# Altium PCB DMI.PcbDoc
Units mm, origin at the board's own origin, x right, y up, seen from the top; angles counter-clockwise.
Board outline 60 x 60 mm, 2 copper layers (Top Layer, Bottom Layer); 48 components, 45 nets, 196 pads, 110 vias.
Unrouted connection lines stored in the file: 58.
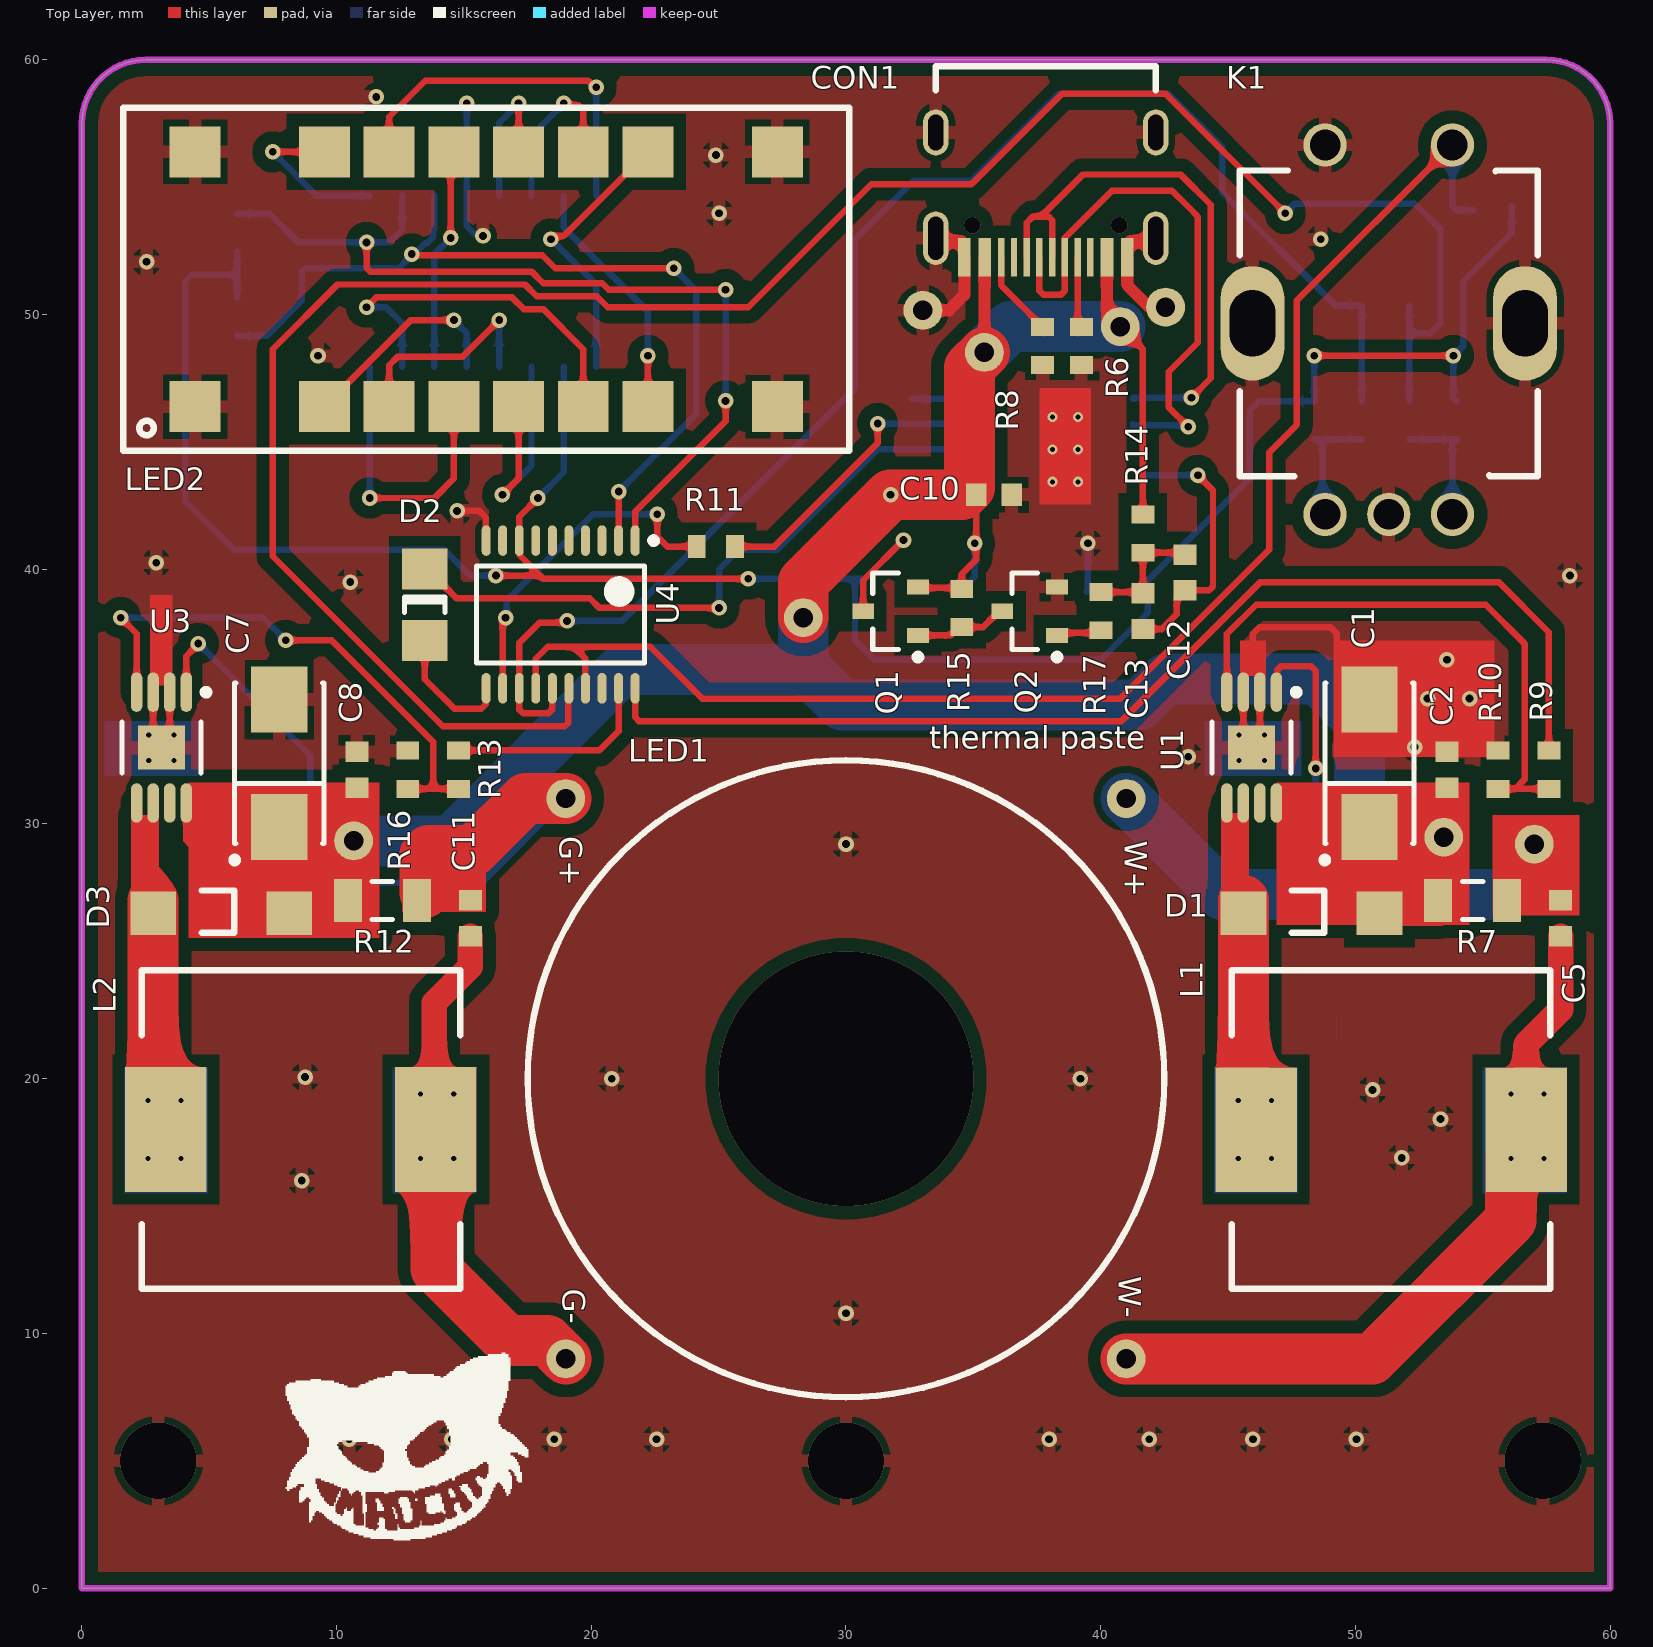
[diagram p0: Top Layer view]
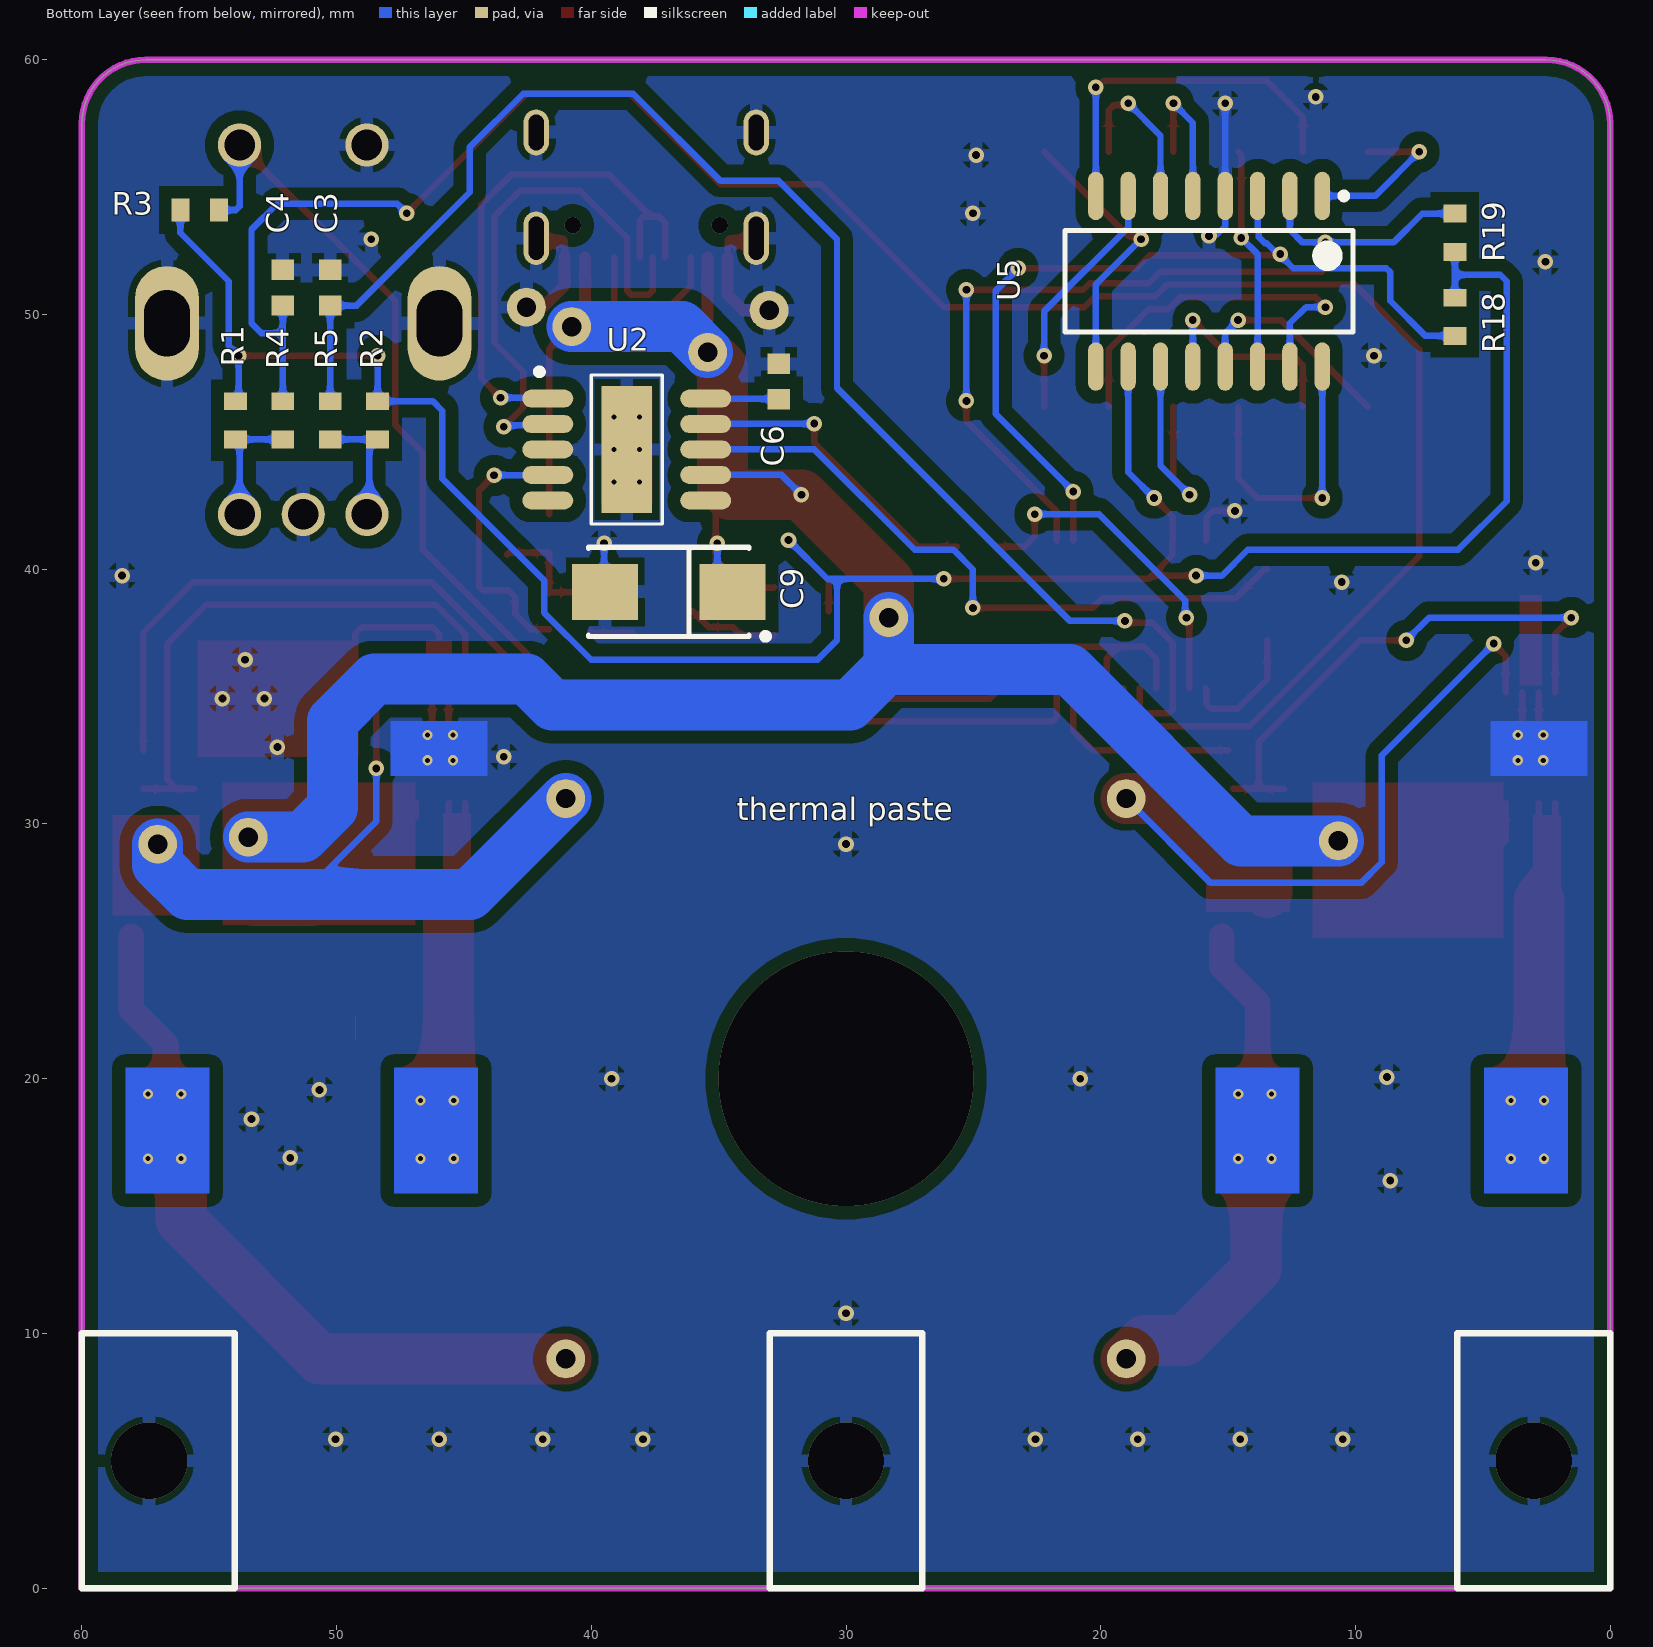
[diagram p1: Bottom Layer view, seen from below]

## Layer stack, top to bottom
Top Solder: solder mask 0.0102, Solder Resist, Dk 3.5
Top Layer: signal copper 0.0356
Dielectric 1: dielectric 0.32, FR-4, Dk 4.8
Bottom Layer: signal copper 0.0356
Bottom Solder: solder mask 0.0102, Solder Resist, Dk 3.5

## Board outline
0,0 60,0 60,0.009 60,57.5 ccw(c57.5,57.5) 57.5,60 2.5,60 ccw(c2.5,57.5) 0,57.5

## Design rules (kind name [scope] priority, off if disabled: settings)
Clearance Clearance_2 [HasFootprint('TSOP65P490_HS-8N')] p1: gap=0.2 ignorepadtopadclearanceinfootprint=TRUE
Clearance Clearance_1 [WithinRoom('USB') vs WithinRoom('USB')] p2: gap=0.15 ignorepadtopadclearanceinfootprint=FALSE
Clearance [All] p3: gap=0.254 ignorepadtopadclearanceinfootprint=TRUE except(0.508: Arc-Poly Arc-Region Track-Poly Track-Region SMDPad-Poly SMDPad-Region THPad-Poly THPad-Region Via-Poly Via-Region Fill-Poly)
HoleSize [All] p1: absolutevalues=TRUE maxlimit=10 minlimit=0.025 maxpercent=80.000 minpercent=20.000
MinimumSolderMaskSliver MinimumSolderMaskSliver_3 [HasFootprint('TSOP65P640-20BL')] p1: minsoldermaskwidth=0.09
MinimumSolderMaskSliver MinimumSolderMaskSliver_2 [HasFootprint('ESOP100-10')] p2: minsoldermaskwidth=0.09
MinimumSolderMaskSliver MinimumSolderMaskSliver_1 [WithinRoom('USB')] p3: minsoldermaskwidth=0.04
MinimumSolderMaskSliver [All] p4: minsoldermaskwidth=0.254
PolygonConnect [All] p1: connectstyle=Relief reliefconductorwidth=0.508 reliefentries=4 polygonreliefangle="90 Angle" airgapwidth=0.254
RoomDefinition USB [False] p1: confinementstyle=ConfineIn formatcopy=TRUE lockcomponents=FALSE outline 32.385,49.276 32.385,60.071 43.434,60.071 43.434,49.276
RoutingVias [All] p1: holewidth=0.305 width=0.61 viastyle="Through Hole" minholewidth=0.305 minwidth=0.61 maxholewidth=0.6 maxwidth=0.85
SMDEntry [All] p1: side=TRUE corner=TRUE anyangle=TRUE
SilkToSolderMaskClearance SilkToSolderMaskClearance_1 [HasFootprint('CD3216-1206')] p1: minsilkscreentomaskgap=0.09 clearancetoexposedcopper=TRUE
SilkToSolderMaskClearance [IsPad] p2: minsilkscreentomaskgap=0.254 clearancetoexposedcopper=TRUE
SolderMaskExpansion [All] p1: expansion=0.102 istentingtop=FALSE
SupplyNets "Schematic Supply Nets_2" [InNet('VMCU')] p1: voltage=0.000
SupplyNets "Schematic Supply Nets_1" [InNet('+5')] p2: voltage=0.000
SupplyNets "Schematic Supply Nets" [InNet('GND')] p3: voltage=0.000
Width Width_1 [InNetClass('Power')] p1: maxlimit=2 minlimit=0.254 preferedwidth=0.254
Width [All] p2: maxlimit=0.254 minlimit=0.254 preferedwidth=0.254
27 further rules are at their usual default settings.

## Classes and differential pairs
net class Power: +5 G+ G- GND NetD1_1 NetD3_1 VMCU W+ W-

## Components (designator, comment, footprint, x,y, rotation, side; value= is the part's Value field where it differs from the comment)
C1 "16V" TC6032-2412 50.55,32.385 r90 top locked value=100uF
C2 "50V" CAPC1608L 53.595,32.13 r270 top locked value=104
C3 "50V" CAPC1608L 50.25,51.054 r270 bottom value=104
C4 "50V" CAPC1608L 52.112,51.054 r270 bottom value=104
C5 "50V" CAPC1608L 58.056,26.3 r90 top locked value=104
C6 "50V" CAPC1608L 32.639,47.371 r270 bottom value=104
C7 "16V" TC6032-2412 7.75,32.385 r90 top value=100uF
C8 "50V" CAPC1608L 10.795,32.13 r270 top locked value=104
C9 "16V" TC6032-2412 36.957,39.116 r0 bottom value=100uF
C10 "50V" CAPC1608L 35.814,42.926 r180 top value=104
C11 "50V" CAPC1608L 15.256,26.3 r90 top locked value=104
C12 "" CAPC1608L 43.307,39.878 r270 top value=106
C13 "" CAPC1608L 41.656,38.354 r270 top value=106
CON1 "USB-TYPEE_C" USB-TYPE_C 37.844,52.45 r180 top
D1 "SS34" DO-214AC 48.27,26.5 r0 top locked
D2 "1N4148" CD3216-1206 13.462,38.608 r90 top
D3 "SS34" DO-214AC 5.47,26.5 r0 top
K1 "EC11" EC11 51.308,49.657 r0 top
L1 "3A" CYH125 51.4,18 r0 top locked value=68uH
L2 "3A" CYH125 8.6,18 r0 top locked value=68uH
LED1 "DULE-LED" DULE-LED-3W 30,20 r270 top
LED2 "S2040AR" S2040AR 15.875,51.388 r0 top locked
Q1 "AO3401,A19T" SOT-23B_L 31.75,38.354 r180 top
Q2 "S8050,J3Y" SOT-23B_L 37.211,38.354 r180 top
R1 "Res1" RESC1608L 53.975,45.847 r270 bottom value=10K
R2 "Res1" RESC1608L 48.387,45.847 r270 bottom value=10K
R3 "Res1" RESC1608L 55.372,54.102 r180 bottom value=10K
R4 "Res1" RESC1608L 52.112,45.847 r90 bottom value=10K
R5 "Res1" RESC1608L 50.25,45.847 r90 bottom value=10K
R6 "Res1" RESC1608L 39.243,48.768 r270 top value=5.1K
R7 "1206 250mW" RESC3216L 54.6,27 r180 top locked value=0.15R
R8 "Res1" RESC1608L 37.719,48.768 r270 top value=5.1K
R9 "Res1" RESC1608L 57.595,32.13 r270 top value=10K
R10 "Res1" RESC1608L 55.595,32.13 r90 top locked value=10K
R11 "Res1" RESC1608L 24.892,40.894 r180 top value=300R
R12 "1206 250mW" RESC3216L 11.8,27 r180 top locked value=0.15R
R13 "Res1" RESC1608L 14.795,32.13 r270 top locked value=10K
R14 "Res1" RESC1608L 41.656,41.402 r270 top value=20K
R15 "Res1" RESC1608L 34.544,38.481 r90 top value=10K
R16 "Res1" RESC1608L 12.795,32.13 r90 top locked value=10K
R17 "Res1" RESC1608L 40.005,38.354 r90 top value=4.7K
R18 "Res1" RESC1608L 6.096,49.911 r90 bottom value=10K
R19 "Res1" RESC1608L 6.096,53.213 r270 bottom value=10K
U1 "AL8860" TSOP65P490_HS-8N 45.925,33 r270 top locked
U2 "CH340K" ESOP100-10 38.608,44.704 r180 bottom
U3 "AL8860" TSOP65P490_HS-8N 3.125,33 r270 top locked
U4 "STC8G1K08-38I" TSOP65P640-20BL 18.796,38.227 r270 top
U5 "TM1650" SOP127P762-16L 15.748,51.308 r270 bottom locked

## Footprints (in the part's own frame and the unit in brackets; to place one, negate y for a bottom-side part, rotate by r counter-clockwise, add the part's x,y. Pads: shape width x height; smd on the part's side, far side on the other; paste and mask are expansions set on the pad)
CAPC1608L [mm] "Chip Capacitor, Body 1.6x0.8mm, IPC High Density"
  rect 0.8x0.9 smd: 1(-0.7,0) 2(0.7,0)
  body extent -0.87,-0.48 0.87,0.48, height 0.85
CD3216-1206 [mm] "Chip Diode; Body 3.2 x 1.6 mm (LxW typ)"
  rect 1.6x1.8 smd: 1(-1.4,0) 2(1.4,0)
  silkscreen extent -0.3,-0.8 0.3,0.8
CYH125 [mm] "CYH125 Inductor"
  rect 3.2x4.9 smd: 1(-5.3,0) 2(5.3,0)
  silkscreen extent -6.25,-6.25 6.25,6.25
DO-214AC [mm] "DO-214AC"
  rect 1.8x1.7 smd: 1(-2.67,0) 2(2.67,0)
  silkscreen extent -0.76,-0.76 0.51,0.89, body extent -2.41,-1.4 2.41,1.4, height 2.5
DULE-LED-3W [mil] "DULE-LED-3W"
  round 60 hole 30: 1(-433.07,433.07) 2(-433.07,-433.07) 3(433.07,-433.07) 4(433.07,433.07)
  silkscreen extent -492,-492 492,492
EC11 [mm] "EC11"
  oval 2.5x4.5 hole 1.8 slot 2.6 at 90 deg: 1(-5.35,0) 1(5.35,0)
  round 1.7 hole 1.2: 2(-2.5,7) 3(2.5,7) 4(-2.5,-7.5) 5(0,-7.5) 6(2.5,-7.5)
  silkscreen extent -5.85,-6 5.85,6, body extent -5.84,-5.97 5.84,5.97, height 5
ESOP100-10 [mm] "10-Pin Small Outline Package 1.00 mm Pitch and Pad"
  rect 2x5 smd: 0(0,0)
  oval 2x0.7 smd: 1(-3.1,2) 2(-3.1,1) 3(-3.1,0) 4(-3.1,-1) 5(-3.1,-2) 6(3.1,-2) 7(3.1,-1) 8(3.1,0) 9(3.1,1) 10(3.1,2)
  silkscreen extent -3.55,-2.92 1.4,3.17, body extent -2.85,-3.18 2.85,3.43, height 2.2
RESC1608L [mm] "Chip Resistor, Body 1.6x0.8mm, IPC High Density"
  rect 0.7x0.9 smd: 1(-0.75,0) 2(0.75,0)
  body extent -0.85,-0.48 0.85,0.48, height 0.6
RESC3216L [mm] "Chip Resistor, Body 3.2x1.6mm, IPC High Density"
  rect 1.1x1.7 smd: 1(-1.35,0) 2(1.35,0)
  silkscreen extent -0.4,-0.75 0.4,0.75, body extent -1.68,-0.87 1.68,0.87, height 0.71
S2040AR [mm] "S2040AR"
  rect 2x2 smd: 1(-6.35,-5) 2(-3.81,-5) 3(-1.27,-5) 4(1.27,-5) 5(3.81,-5) 6(6.35,-5) 7(6.35,5) 8(3.81,5) 9(1.27,5) 10(-1.27,5) 11(-3.81,5) 12(-6.35,5) 13(-11.43,-5) 13(-11.43,5) 13(11.43,-5) 13(11.43,5)
  silkscreen extent -14.25,-6.73 14.25,6.73, body extent -14.35,-5.21 14.22,5.21, height 3
SOP127P762-16L [mm] "16-Pin Small Outline Package 1.27 mm Pitch"
  oval 1.9x0.6 smd: 1(-3.35,4.445) 2(-3.35,3.175) 3(-3.35,1.905) 4(-3.35,0.635) 5(-3.35,-0.635) 6(-3.35,-1.905) 7(-3.35,-3.175) 8(-3.35,-4.445) 9(3.35,-4.445) 10(3.35,-3.175) 11(3.35,-1.905) 12(3.35,-0.635) 13(3.35,0.635) 14(3.35,1.905) 15(3.35,3.175) 16(3.35,4.445)
  silkscreen extent -3.47,-5.65 2,5.65, body extent -2.85,-5.65 2.85,5.65, height 2.2
SOT-23B_L [mm] "SOT23, 3-Leads, Body 2.9x1.3mm, Pitch 0.95mm, Lead Span 2.4mm, IPC High Density"
  rect 0.85x0.6 smd: 1(-1.075,0.95) 2(-1.075,-0.95) 3(1.075,0)
  silkscreen extent -1.2,-1.5 0.7,1.92, body extent -0.7,-1.5 0.7,1.5, height 1.14
TC6032-2412 [mm] "Capacitor, SM Tantalum; Body 6.0 x 3.2 mm (LxW typ)"
  rect 2.6x2.2 smd: 1(-2.5,0) 2(2.5,0)
  silkscreen extent -3.92,-1.75 3.15,1.87, body extent -3.05,-1.65 3.17,1.65, height 3
TSOP65P490_HS-8N [mm] "TSOP, 8-Leads, Body 3x3mm, Pitch 0.65mm, Exposed Pad, IPC Medium Density"
  oval 1.55x0.45 smd: 1(-2.175,0.975) 2(-2.175,0.325) 3(-2.175,-0.325) 4(-2.175,-0.975) 5(2.175,-0.975) 6(2.175,-0.325) 7(2.175,0.325) 8(2.175,0.975)
  rect 1.73x1.85 smd: 9(0,0)
  silkscreen extent -2.3,-1.55 1,1.88, body extent -1.55,-1.55 1.55,1.55, height 1.09
TSOP65P640-20BL [mm] "TSOP, 20-Leads, Body 6.5x4.4mm, Pitch 0.65mm, IPC High Density"
  oval 1.2x0.35 smd: 1(-2.9,2.925) 2(-2.9,2.275) 3(-2.9,1.625) 4(-2.9,0.975) 5(-2.9,0.325) 6(-2.9,-0.325) 7(-2.9,-0.975) 8(-2.9,-1.625) 9(-2.9,-2.275) 10(-2.9,-2.925) 11(2.9,-2.925) 12(2.9,-2.275) 13(2.9,-1.625) 14(2.9,-0.975) 15(2.9,-0.325) 16(2.9,0.325) 17(2.9,0.975) 18(2.9,1.625) 19(2.9,2.275) 20(2.9,2.925)
  silkscreen extent -3.02,-3.3 1.9,3.78, body extent -2.25,-3.3 2.25,3.3, height 1.2
USB-TYPE_C [mm]
  oval 1x2.1 hole 0.6 slot 1.7 at 90 deg: 1(-4.32,-0.55) 1(4.32,-0.55)
  oval 1x1.8 hole 0.6 slot 1.4 at 90 deg: 1(-4.32,-4.7) 1(4.32,-4.7)
  rect 0.5x1.5 smd: 2(-3.2,0.2) 3(-2.4,0.2) 12(2.4,0.2) 13(3.2,0.2)
  rect 0.25x1.5 smd: 4(-1.75,0.2) 5(-1.25,0.2) 6(-0.75,0.2) 7(-0.25,0.2) 8(0.25,0.2) 9(0.75,0.2) 10(1.25,0.2) 11(1.75,0.2)
  silkscreen extent -4.32,-7.3 4.32,-6.35, body extent -4.32,-7.37 4.32,0.13, height 3.26

## Part data
C1 C7 C9: library part "Cap Pol1", "Polarized Capacitor (Radial)", LatestRevisionDate=17-Jul-2002, LatestRevisionNote="Re-released for DXP Platform.", PackageDescription="Polarized Capacitor (Radial); 2 Leads", PackageReference=RB7.6-15, Published=8-Jun-2000, Publisher="Altium Limited"
C2 C3 C4 C5 C6 C8 C10 C11 C12 C13: library part Cap, "Capacitor", LatestRevisionDate=17-Jul-2002, LatestRevisionNote="Re-released for DXP Platform.", PackageDescription="Radial Cap, Thru-Hole; 2 Leads; 0.3 in Pin Spacing", PackageReference=RAD-0.3, Published=8-Jun-2000, Publisher="Altium Limited"
D1 D3: library part "D Schottky", "Schottky Diode", Code_JEDEC=DO-214-AA, LatestRevisionDate=17-Jul-2002, LatestRevisionNote="Re-released for DXP Platform.", PackageDescription="DO-214-AA/SMB; 2 C-Bend Leads; Body 5.3 x 3.6 mm, inc. leads (LxW)", PackageReference=SMB, Published=8-Jun-2000, Publisher="Altium Limited"
D2: library part Diode, "Default Diode", Code_JEDEC=DO-214-AB, LatestRevisionDate=17-Jul-2002, LatestRevisionNote="Re-released for DXP Platform.", PackageDescription="DO-214-AB/SMC; 2 C-Bend Leads; Body 7.9 x 5.9 mm, inc. leads (LxW)", PackageReference=SMC, PackageVersion=Sep-1996, Published=8-Jun-2000, Publisher="Altium Limited"
L1 L2: library part Inductor, "Inductor", Code_IEC=1005, Code_JEITA=0402, LatestRevisionDate=29-May-2009, LatestRevisionNote="IPC-7351 Footprint Added.", PackageDescription="Chip Inductor", PackageReference=0402-A, Published=8-Jun-2000, Publisher="Altium Limited"
Q1: library part PMOS-2, "P-Channel Power MOSFET", ComponentLink1Description="Manufacturer Link", ComponentLink1URL=http://www.irf.com/, DatasheetVersion=PD-9.390D, LatestRevisionDate=17-Jul-2002, LatestRevisionNote="Re-released for DXP Platform.", Note="Pin 4 not drawn and electrically connected to Pin 2.", PackageDescription="TO, Thru-Hole, Vertical, Heatsink Mounted; 3 In-Line Leads; Pitch 2.54 mm", PackageReference=TO-220AB, PackageVersion=Feb-1997, Published=8-Jun-2000, Publisher="Altium Limited"
Q2: library part NPN, "NPN Bipolar Transistor", Code_JEDEC=TO-226-AA, LatestRevisionDate=17-Jul-2002, LatestRevisionNote="Re-released for DXP Platform.", PackageDescription="TO, Flat Index; 3 In-Line, Axial Leads; Body Dia. 4.8mm; Leads 0.55 x 0.51 mm (max)", PackageReference=TO-226-AA, Published=8-Jun-2000, Publisher="Altium Limited"
R1 R2 R3 R4 R5 R6 R8 R9 R10 R11 R13 R14 R15 R16 R17 R18 R19: "Resistor", LatestRevisionDate=17-Jul-2002, LatestRevisionNote="Re-released for DXP Platform.", PackageDescription="Axial Device, Thru-Hole; 2 Leads; 0.3 in Pin Spacing", PackageReference=AXIAL-0.3, Published=8-Jun-2000, Publisher="Altium Limited"
R7 R12: library part Res1, "Resistor", LatestRevisionDate=17-Jul-2002, LatestRevisionNote="Re-released for DXP Platform.", PackageDescription="Axial Device, Thru-Hole; 2 Leads; 0.3 in Pin Spacing", PackageReference=AXIAL-0.3, Published=8-Jun-2000, Publisher="Altium Limited"

## Free pads (board coordinates)
  round 1.524 hole 0.762: 18(10.668,29.337) 18(28.321,38.1) 18(33.02,50.165) 18(35.433,48.514) 18(40.767,49.53) 18(42.545,50.292) 18(53.467,29.483) 18(57.023,29.21)

## Via types
v1: diameter 0.61, hole 0.305, Top Layer to Bottom Layer, 74 vias
v2: diameter 0.4, hole 0.2, Top Layer to Bottom Layer, 30 vias
v3: diameter 3, hole 3, Top Layer to Bottom Layer, 3 vias
v4: diameter 0.65, hole 0.65, Top Layer to Bottom Layer, 2 vias
v5: diameter 10, hole 10, Top Layer to Bottom Layer, 1 vias

## Nets (pads, with @x,y where several pads share a name; then routed paths per layer and width w, separated by ;. In a path a pad name is that pad's centre, name@x,y a point inside that pad or via, vN(x,y) a via of type N, cw(c..) or ccw(c..) an arc to the next point about the centre after c; other vN are vias at no path point)
+5: C1.1 C2.2 C7.1 C8.2 C9.1 C10.2 CON1.3 CON1.12 D1.2 D3.2 pad.18@10.668,29.337 pad.18@28.321,38.1 pad.18@35.433,48.514 pad.18@40.767,49.53 pad.18@53.467,29.483 Q1.2 R7.2 R12.2 R14.1 R15.2 U1.8 U2.7 U3.8 | length 116.8
  Top Layer w0.254: U3.8 4.1,29.359 4.249,29.21 6.35,29.21 ; Q1.2 32.861,39.268 34.508,39.268 34.544,39.304 34.544,39.813 35.114,40.383 C10.2 ; pad.18@40.767,49.53 41.121,49.176 41.656,48.641 R14.1 ; U1.8@46.9,30.275 U1.8 ; C1.1@50.419,28.956 C1.1@50.669,29.206 ; C1.1@50.796,29.079 C1.1@50.796,29.885 ; C1.1@50.8,29.885 50.8,30.099 52.131,31.43 C2.2 ; 52.336,26.619 52.717,27 R7.2@52.796,27.079
  Top Layer w0.45: pad.18@40.413,49.884 cw(c40.767,49.53) 41.267,49.53 cw(c40.767,49.53) 41.121,49.176 cw(c40.767,49.53) pad.18@40.413,49.884
  Top Layer w0.47: pad.18@35.433,48.514 35.438,48.519 35.438,52.244 CON1.12 ; CON1.3 40.244,50.053 40.413,49.884 pad.18@40.767,49.53
  Top Layer w2: D3.2@8.14,27 9.525,27 ; pad.18@28.321,38.1 28.321,39.497 v1(31.75,42.926) 34.559,42.926 34.841,43.208 34.841,47.922 pad.18@35.433,48.514 ; D1.2@50.94,27 52.717,27 R7.2
  Bottom Layer w0.254: v1(31.75,42.926) 32.528,43.704 U2.7 ; C9.1 35.052,39.711 v1(35.052,41.021)
  Bottom Layer w2: pad.18@10.668,29.337 14.486,29.337 21.217,36.068 28.448,36.068 ; pad.18@28.321,38.1 28.321,36.195 28.448,36.068 ; pad.18@35.433,48.514 36.449,49.53 pad.18@40.767,49.53 ; pad.18@53.467,29.483 51.337,29.483 50.165,30.655 50.165,34.036 48.514,35.687 42.545,35.687 41.529,34.671 29.845,34.671 28.448,36.068
A: LED2.11 U5.8 | length 14.5
  Top Layer w0.254: LED2.11 12.065,57.769 13.478,59.182 19.866,59.182 20.12,58.928 v1(20.193,58.928)
  Bottom Layer w0.254: U5.8 v1(20.193,58.928)
B: LED2.7 U5.9 | length 11
  Top Layer w0.254: v1(18.415,52.959) 18.511,52.959 18.642,53.089 18.926,53.089 LED2.7
  Bottom Layer w0.254: v1(18.415,52.959) 20.193,51.181 U5.9
C: LED2.4 U5.11 | length 9.2
  Top Layer w0.254: v1(16.51,42.926) 17.145,43.561 LED2.4
  Bottom Layer w0.254: v1(16.51,42.926) 17.653,44.069 U5.11
D: LED2.2 U5.12 | length 8.5
  Top Layer w0.254: LED2.2 12.065,48.006 12.395,48.336 14.935,48.336 v1(16.383,49.784)
  Bottom Layer w0.254: U5.12 v1(16.383,49.784)
D+: CON1.7 CON1.9 U2.1 | length 22.1
  Top Layer w0.254: CON1.9 37.094,53.604 37.338,53.848 37.655,53.848 ; CON1.7 38.096,52.252 38.096,53.699 37.947,53.848 37.655,53.848 ; v1(43.561,46.736) 44.323,47.498 44.323,54.312 43.136,55.499 39.306,55.499 37.655,53.848
  Bottom Layer w0.254: U2.1@41.252,46.688 41.323,46.688 41.275,46.736 v1(43.561,46.736)
D-: CON1.6 CON1.8 U2.2 | length 22.2
  Top Layer w0.254: CON1.8 37.594,50.935 37.743,50.786 38.445,50.786 38.594,50.935 CON1.6 38.596,52.252 38.596,53.019 40.441,54.864 42.799,54.864 43.434,54.229 43.815,53.848 43.815,48.895 42.672,47.752 42.672,46.355 v1(43.434,45.593)
  Bottom Layer w0.254: U2.2@41.252,45.688 41.292,45.648 43.379,45.648 v1(43.434,45.593)
DIG1: LED2.12 U5.1 | length 6.6
  Top Layer w0.254: v1(7.493,56.388) LED2.12
  Bottom Layer w0.254: v1(7.493,56.388) 9.223,54.658 U5.1
DIG2: LED2.9 U5.5 | length 5.9
  Top Layer w0.254: LED2.9 v1(17.145,58.293)
  Bottom Layer w0.254: U5.5 16.383,57.531 v1(17.145,58.293)
DIG3: LED2.8 U5.6 | length 6.7
  Top Layer w0.254: v1(18.923,58.293) 18.991,58.225 19.48,58.225 19.685,58.02 LED2.8
  Bottom Layer w0.254: U5.6 17.653,57.023 v1(18.923,58.293)
DIG4: LED2.6 U5.7 | length 9.6
  Top Layer w0.254: LED2.6 v1(22.225,48.387)
  Bottom Layer w0.254: U5.7 18.923,53.421 22.225,50.119 v1(22.225,48.387)
DIM1: R9.1 U4.20 | length 44.8
  Top Layer w0.254: U4.20 21.721,34.189 21.87,34.04 40.815,34.04 46.272,39.497 55.626,39.497 57.595,37.528 R9.1
DIM2: R13.1 U4.19 | length 8.1
  Top Layer w0.254: R13.1@14.986,32.893 20.32,32.893 21.071,33.644 U4.19
DP: LED2.3 U5.16 | length 11.6
  Top Layer w0.254: v1(11.303,42.799) 13.843,42.799 14.605,43.561 LED2.3
  Bottom Layer w0.254: v1(11.303,42.799) U5.16
DTR: C12.2 C13.2 U2.4 | length 10.6
  Top Layer w0.254: C13.2 42.396,37.654 42.984,38.242 42.984,38.905 43.257,39.178 C12.2 44.259,39.178 44.408,39.327 44.408,43.095 v1(43.815,43.688)
  Bottom Layer w0.254: U2.4 41.716,43.696 43.807,43.696 v1(43.815,43.688)
E: LED2.1 U5.13 | length 8.5
  Top Layer w0.254: LED2.1 12.921,49.784 v1(14.605,49.784)
  Bottom Layer w0.254: v1(14.605,49.784) 15.113,49.276 U5.13
F: LED2.10 U5.14 | length 8.7
  Top Layer w0.254: v1(14.478,53.01) 14.478,56.261 LED2.10
  Bottom Layer w0.254: U5.14 13.843,52.375 v1(14.478,53.01)
G: LED2.5 U5.15 | length 15.1
  Top Layer w0.254: v1(11.176,50.292) 11.557,50.673 16.891,50.673 17.348,50.216 18.11,50.216 19.685,48.641 LED2.5
  Bottom Layer w0.254: v1(11.176,50.292) 11.938,50.292 12.573,49.657 U5.15
G+: C11.2 LED1.2 R12.1 U3.1 | length 32.6
  Top Layer w0.254: U3.1 4.1,36.586 4.572,37.058 v1(4.572,37.084) ; R12.1 R12.1@13.462,27.312
  Top Layer w2: R12.1@13.462,27.312 13.462,28.807 13.611,28.956 15.367,28.956 17.411,31 LED1.2
  Bottom Layer w0.254: v1(4.572,37.084) 8.964,32.692 8.964,28.501 9.779,27.686 15.686,27.686 LED1.2
G-: C11.1 L2.2 LED1.3 | length 20.2
  Top Layer w0.254: L2.2@13.843,18.057 L2.2
  Top Layer w1: L2.2@13.843,18.057 13.843,22.987 15.256,24.4 C11.1
  Top Layer w2: L2.2 13.9,16.86 13.9,12.527 16.711,9.716 18.284,9.716 LED1.3
  other v2: 13.3,16.86 14.6,16.86 13.3,19.4 14.6,19.4
GND: C1.2 C2.1 C3.1 C4.1 C6.1 C7.2 C8.1 C9.2 C10.1 CON1.1 CON1.2 CON1.13 K1.1 K1.2 K1.5 LED2.13 pad.18@33.02,50.165 pad.18@42.545,50.292 Q2.2 R6.2 R8.2 R10.2 R16.2 U1.2 U1.3 U1.9 U2.0 U2.3 U3.2 U3.3 U3.9 U4.10 U5.4 | length 51.1
  Top Layer w0.254: U3.3 2.8,33.325 U3.9 3.45,33.325 U3.2 ; v1(14.732,42.291) 15.599,42.291 15.853,42.038 15.853,41.145 U4.10 ; CON1.1@33.524,53 CON1.1@33.651,52.873 ; CON1.13@34.521,52.873 34.644,52.75 CON1.13 ; CON1.2 41.044,52.75 CON1.2@41.167,52.873 ; CON1.1@42.037,52.873 CON1.1@42.164,53 ; v2(45.425,33.5) 45.6,33.675 U1.3 ; 45.974,36.512 45.974,37.465 46.228,37.719 49.022,37.719 49.276,37.465 49.276,37.084 49.943,36.417 49.943,36.406 50.349,36 53.145,36 ; U1.2 46.25,33.675 v2(46.425,33.5) ; v1(52.832,34.925) 52.832,35.687 53.145,36 ; v1(53.594,36.449) 53.145,36
  Top Layer w0.45: pad.18@33.52,50.165 ccw(c33.02,50.165) pad.18@33.52,50.165 ; pad.18@43.045,50.292 ccw(c42.545,50.292) pad.18@43.045,50.292
  Top Layer w0.47: pad.18@33.02,50.165 34.036,50.165 34.644,50.773 CON1.13 ; CON1.2 41.044,51.158 41.91,50.292 pad.18@42.545,50.292
  Top Layer w0.5: CON1.1@33.651,52.873 CON1.13@34.521,52.873 ; CON1.2@41.167,52.873 CON1.1@42.037,52.873
  Bottom Layer w0.254: v1(15.113,58.293) 15.113,53.467 15.426,53.154 15.68,53.154 v1(15.748,53.086) ; C9.2 39.497,39.156 v1(39.497,41.021)
  Bottom Layer w0.45: pad.18@33.52,50.165 ccw(c33.02,50.165) pad.18@33.52,50.165 ; pad.18@43.045,50.292 ccw(c42.545,50.292) pad.18@43.045,50.292
  other v1: 10.499,5.842 14.52,5.842 18.542,5.842 22.564,5.842 37.973,5.842 41.91,5.842 45.974,5.842 50.038,5.842 30,10.795 8.636,16.002 51.816,16.891 53.34,18.415 50.673,19.558 20.8,20 39.203,20 8.763,20.066 30,29.21 43.434,32.639 52.324,33.02 54.483,34.925 10.541,39.497 58.42,39.751 2.921,40.259 9.271,48.387 2.54,52.07 48.641,52.959 25.019,53.975 24.892,56.261 11.557,58.547
  other v2: 2.625,32.5 3.625,32.5 45.425,32.5 46.425,32.5 2.625,33.5 3.625,33.5 38.108,43.434 39.108,43.434 38.108,44.704 39.108,44.704 38.108,45.974 39.108,45.974
  other v3: 3,5 30,5 57.357,5
KA: C3.2 R5.2 U4.13 U4.15 | length 58.6
  Top Layer w0.254: U4.15 18.471,34.491 18.322,34.343 17.32,34.343 17.171,34.491 U4.13 17.171,37.11 17.966,37.905 18.982,37.905 v1(19.05,37.973)
  Bottom Layer w0.254: v1(19.05,37.973) 21.209,37.973 30.353,47.117 30.353,52.959 32.639,55.245 34.925,55.245 38.354,58.674 42.672,58.674 44.767,56.579 44.767,54.801 49.214,50.354 C3.2 R5.2
KB: C4.2 R4.2 U4.16 | length 86
  Top Layer w0.254: U4.16 19.103,35.309 19.103,33.983 18.954,33.835 14.171,33.835 7.493,40.513 7.493,48.641 10.033,51.181 17.399,51.181 17.856,50.724 20.217,50.724 20.649,50.292 26.162,50.292 30.988,55.118 32.385,55.118 34.925,55.118 38.481,58.674 42.545,58.674 v1(47.244,53.975)
  Bottom Layer w0.254: v1(47.244,53.975) 47.625,54.356 52.324,54.356 53.34,53.34 53.34,49.657 52.959,49.276 52.112,49.276 ; R4.2 52.112,49.276 ; C4.2 52.112,49.276
KC: K1.3 R3.2 U4.14 U4.17 | length 57.4
  Top Layer w0.254: U4.14 17.821,36.49 18.288,36.957 19.304,36.957 ; U4.17 19.771,36.49 19.304,36.957 ; K1.3 47.701,50.55 47.701,45.669 46.609,44.577 46.609,40.767 40.767,34.925 24.352,34.925 22.32,36.957 19.304,36.957
  Bottom Layer w0.254: K1.3 53.808,54.251 53.957,54.102 R3.2
NetC6_2: C6.2 U2.10 | length 2.5
  Bottom Layer w0.254: C6.2@32.589,46.671 C6.2 32.656,46.688 U2.10@35.052,46.688
NetC12_1: C12.1 C13.1 R14.2 R17.2 | length 5
  Top Layer w0.254: R17.2 41.606,39.104 C13.1 R14.2 43.233,40.652 C12.1
NetCON1_5: CON1.5 R6.1 | length 3
  Top Layer w0.254: R6.1@39.094,49.276 39.094,49.518 CON1.5
NetCON1_11: CON1.11 R8.1 | length 3.6
  Top Layer w0.254: CON1.11 36.094,51.143 R8.1 ; R8.1@37.745,49.276 R8.1@37.745,49.518
NetD1_1: D1.1 L1.1 U1.5 U1.6 | length 12.7
  Top Layer w0.254: U1.5 44.95,29.225 45.6,28.575 U1.6 ; v2(45.4,19.14) L1.1@45.6,19.34
  Top Layer w2: L1.1@45.6,19.34 D1.1@45.6,27
  other v2: 45.4,16.86 46.7,16.86 46.7,19.14
NetD2_2: D2.2 U2.8 | length 26.1
  Top Layer w0.254: D2.2 13.562,40.008 14.708,38.862 19.939,38.862 20.32,38.481 v1(25.019,38.481)
  Bottom Layer w0.254: v1(25.019,38.481) 25.019,40.005 25.781,40.767 27.305,40.767 31.242,44.704 U2.8
NetD3_1: D3.1 L2.1 U3.5 U3.6 | length 14.1
  Top Layer w0.254: U3.5 2.15,29.092 2.8,28.442 ; D3.1@2.8,27 2.8,28.442 ; U3.6 2.8,28.442
  Top Layer w2: L2.1@2.8,19.34 D3.1@2.8,27
  other v2: 2.6,16.86 3.9,16.86 2.6,19.14 3.9,19.14
NetK1_4: K1.4 R2.2 R5.1 | length 4.9
  Bottom Layer w0.254: R2.2 R2.2@48.487,45.097 ; K1.4 48.71,42.255 48.71,44.874 R2.2@48.487,45.097 ; R5.1 R2.2@48.487,45.097
NetK1_6: K1.6 R1.2 R4.1 | length 4.9
  Bottom Layer w0.254: R4.1 R1.2 53.808,44.93 K1.6
NetQ1_1: Q1.1 Q2.3 R15.1 | length 3.7
  Top Layer w0.254: Q1.1 34.117,37.404 34.444,37.731 R15.1 35.388,37.731 36.011,38.354 Q2.3
NetQ2_1: Q2.1 R17.1 | length 1.8
  Top Layer w0.254: Q2.1 38.386,37.504 39.905,37.504 R17.1
NetR9_2: R9.2 R10.1 U1.4 | length 23.6
  Top Layer w0.254: U1.4 44.957,35.182 44.957,37.464 46.101,38.608 55.118,38.608 56.642,37.084 56.642,31.75 56.277,31.385 55.6,31.385 R10.1 R9.2
NetR11_1: R11.1 U2.9 | length 12.3
  Top Layer w0.254: R11.1 27.178,40.894 31.242,44.958 v1(31.242,45.72)
  Bottom Layer w0.254: v1(31.242,45.72) 31.25,45.712 35.5,45.712 U2.9
NetR13_2: R13.2 R16.1 U3.4 | length 21.3
  Top Layer w0.254: v1(1.524,38.1) 2.15,37.474 U3.4 ; v1(8.001,37.211) 9.803,37.211 13.795,33.219 13.795,31.38 ; R16.1 13.795,31.38 ; R13.2 13.795,31.38
  Bottom Layer w0.254: v1(1.524,38.1) 7.112,38.1 v1(8.001,37.211)
RXD: D2.1 U4.11 | length 5.1
  Top Layer w0.254: D2.1 13.462,35.687 14.627,34.522 15.675,34.522 15.853,34.699 15.853,35.309 U4.11
SCL: R19.1 U4.1 U5.2 | length 35.3
  Top Layer w0.254: v1(11.176,52.832) 11.176,51.838 11.325,51.689 17.653,51.689 18.11,51.232 20.427,51.232 20.681,50.978 v1(25.273,50.978) ; U4.1 21.719,41.129 21.719,42.262 25.273,45.816 v1(25.273,46.609)
  Bottom Layer w0.254: R19.1 7.378,53.963 8.509,52.832 v1(11.176,52.832) 12.078,52.832 12.573,53.327 U5.2 ; v1(25.273,46.609) v1(25.273,50.978)
SDA: R18.1 U4.2 U5.3 | length 34.5
  Top Layer w0.254: v1(12.954,52.375) 13.005,52.324 18.08,52.324 18.588,51.816 v1(23.241,51.816) ; U4.2 21.076,41.133 21.076,43.047 v1(21.082,43.053)
  Bottom Layer w0.254: R18.1 7.251,49.161 8.636,50.546 8.636,51.667 8.785,51.816 12.446,51.816 v1@12.954,52.324 ; v1(12.954,52.375) v1@12.954,52.324 ; U5.3 13.843,53.345 13.792,53.294 13.792,53.042 13.552,52.802 13.478,52.802 12.999,52.324 v1@12.954,52.324 ; v1(21.082,43.053) 24.13,46.101 24.13,50.927 v1(23.241,51.816)
TXD: R11.2 U4.12 | length 13.4
  Top Layer w0.254: U4.12 16.521,37.888 16.637,38.004 v1(16.637,38.1) ; v1(22.591,42.164) 22.591,41.29 22.987,40.894 R11.2
  Bottom Layer w0.254: v1(16.637,38.1) 16.688,38.151 16.688,38.786 20.066,42.164 v1(22.591,42.164)
VMCU: Q1.3 R1.1 R2.1 R3.1 R18.2 R19.2 U4.8 U5.10 | length 98.6
  Top Layer w0.254: v1(16.256,39.751) 17.986,39.751 ; v1(17.907,42.799) 17.171,42.063 U4.8 17.189,41.109 17.189,40.547 17.986,39.751 ; v1(26.162,39.624) 18.113,39.624 17.986,39.751 ; Q1.3 30.675,39.565 v1(32.258,41.148) ; v1(48.387,48.387) v1(53.848,48.387)
  Bottom Layer w0.254: R18.2 6.096,51.562 ; R19.2 6.096,51.562 ; v1(16.256,39.751) 15.24,39.751 14.224,40.767 5.969,40.767 4.064,42.672 4.064,51.308 4.318,51.562 6.096,51.562 ; v1(17.907,42.799) 18.923,43.815 U5.10 ; v1(26.162,39.624) 30.353,39.624 ; v1(32.258,41.148) 30.734,39.624 30.353,39.624 ; v1(48.387,48.387) R2.1 46.216,46.597 45.847,46.228 45.847,43.561 41.842,39.556 41.842,38.286 40.005,36.449 31.115,36.449 30.353,37.211 30.353,39.624 ; R1.1 53.848,46.724 v1(53.848,48.387) 54.229,48.768 54.229,51.308 56.134,53.213 R3.1@56.134,54.266
W+: C5.2 LED1.1 pad.18@57.023,29.21 R7.1 U1.1 | length 34.1
  Top Layer w0.254: U1.1 46.928,35.203 46.928,36.046 47.077,36.195 48.26,36.195 48.438,36.017 v1(48.438,32.182) ; pad.18@57.023,29.21 57.023,27.983 58.006,27 C5.2
  Bottom Layer w0.254: v1(48.438,32.182) 48.438,30.099 51.308,27.229
  Bottom Layer w2: LED1.1 44.771,27.229 51.308,27.229 55.851,27.229 57.023,28.401 pad.18@57.023,29.21
W-: C5.1 L1.2 LED1.4 | length 28
  Top Layer w0.254: L1.2@56.642,18.058 L1.2 ; 58.056,22.716 58.061,22.711
  Top Layer w1: L1.2 56.7,21.35 58.061,22.711 ; 58.056,22.716 C5.1
  Top Layer w2: LED1.4 50.656,9 56.1,14.444 v2(56.1,16.86)
  other v2: 57.4,16.86 56.1,19.4 57.4,19.4
pads on no net: CON1.4 CON1.10 U1.7 U2.5 U2.6 U3.7 U4.3 U4.4 U4.5 U4.6 U4.7 U4.9 U4.18
copper on no net:
  other v4: 34.954,53.5 40.734,53.5
  other v5: 30,20

## Polygon pours and split planes (outlines as drawn)
GND on Top Layer "GND_L01_P000" (solid, remove dead copper, pour order 0): 0,0 60,0 60,0.009 60,57.5 ccw(c57.5,57.5) 57.5,60 2.5,60 ccw(c2.5,57.5) 0,57.5
GND on Bottom Layer "GND_L02_P001" (solid, remove dead copper, pour order 1): 0,0 60,0 60,0.009 60,57.5 ccw(c57.5,57.5) 57.5,60 2.5,60 ccw(c2.5,57.5) 0,57.5

## Keep-outs
Keep-Out Layer:
  the board outline again, w0.254

## Other copper
Top Layer:
  rectangle net GND: 45.466,35.814 46.482,37.211
  rectangle net GND: 49.149,32.639 55.468,37.211
  rectangle net G+: 12.573,26.543 15.875,28.194
  rectangle net +5: 46.9,26.035 54.483,31.623
  rectangle net NetD1_1: 44.721,26.289 45.825,30.439
  rectangle net W+: 55.372,26.416 58.801,30.353
  rectangle net GND: 2.667,35.433 3.556,38.989
  rectangle net GND: 37.592,42.545 39.624,47.117
  rectangle net NetD3_1: 1.92,26.416 3.024,30.353
  rectangle net +5: 4.191,25.527 11.684,31.623
Bottom Layer:
  rectangle net NetD1_1: 44.45,15.494 47.752,20.447
  rectangle net W-: 54.991,15.494 58.293,20.447
  rectangle net GND: 0.889,31.877 4.699,34.036
  rectangle net GND: 44.069,31.877 47.879,34.036
  rectangle net NetD3_1: 1.651,15.494 4.953,20.447
  rectangle net G-: 12.192,15.494 15.494,20.447

## Silkscreen, mask and mechanical layers (free items; w line width, h text height)
Top Overlay:
  drawing of 8 lines, arcs and shapes, not listed
  text "thermal paste" at 33.274,32.656 h1.52
Bottom Overlay:
  lines w0.254: 0,0 6,0 6,10 0,10 0,0 ; 27,0 33,0 33,10 27,10 27,0 ; 54,0 60,0 60,10 54,10 54,0
  text "thermal paste" at 34.29,29.862 h1.52
Top Solder:
  circle w0.47: c10.668,29.337 r0.6
  circle w0.47: c53.467,29.483 r0.6
  circle w0.47: c28.321,38.1 r0.6
  circle w0.47: c57.023,29.21 r0.6
  circle w0.47: c33.02,50.165 r0.6
  circle w0.47: c42.545,50.292 r0.6
  circle w0.47: c40.767,49.53 r0.6
  circle w0.47: c35.433,48.514 r0.6
  rectangle: 37.592,42.545 39.624,47.117
  lines w0.47: 33.02,50.165 34.036,50.165 34.644,50.773 34.644,52.197 ; 35.433,48.514 35.433,52.197 ; 40.244,50.038 40.244,52.197 ; 40.259,50.038 40.767,49.53 ; 41.044,51.525 41.044,51.158 41.91,50.292 42.545,50.292
  text "Microscope Iluminator 2.6" at 34.798,3.095 h1.7
Bottom Solder:
  circle w0.47: c10.668,29.337 r0.6
  circle w0.47: c53.467,29.483 r0.6
  circle w0.47: c28.321,38.1 r0.6
  circle w0.47: c57.023,29.21 r0.6
  circle w0.47: c33.02,50.165 r0.6
  circle w0.47: c42.545,50.292 r0.6
  circle w0.47: c40.767,49.53 r0.6
  circle w0.47: c35.433,48.514 r0.6
Mechanical 15:
  circle w0.254: c30,20 r9.203
  lines w0.254: 32.385,49.276 43.434,49.276 43.434,60.071 32.385,60.071 32.385,49.276

## Text inside footprints (layer, text, board x,y; h text height)
LED1: Top Overlay "W+" at 40.64,29.337 h1.52 r270; Top Overlay "W-" at 40.414,12.253 h1.52 r270; Top Overlay "G+" at 18.459,29.525 h1.52 r270; Top Overlay "G-" at 18.586,11.745 h1.52 r270